# EAGLE board untitled (EAGLE 8.0.0)
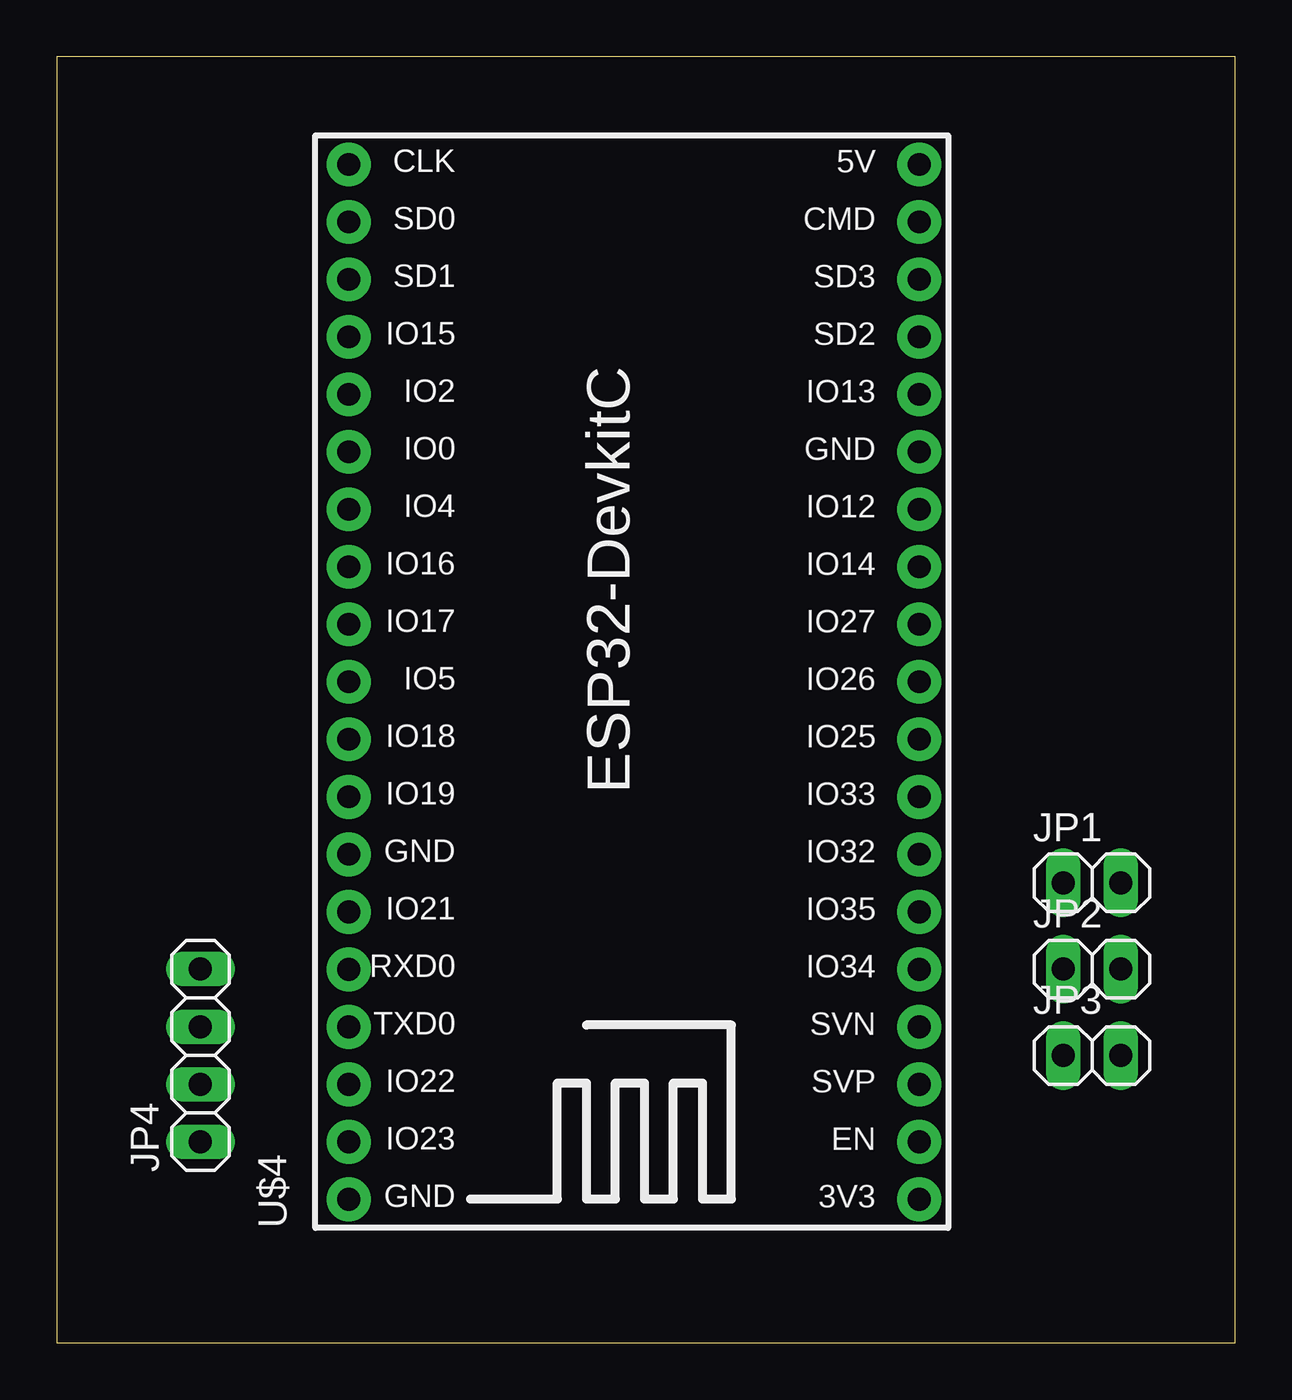
[diagram p0: board, top side]
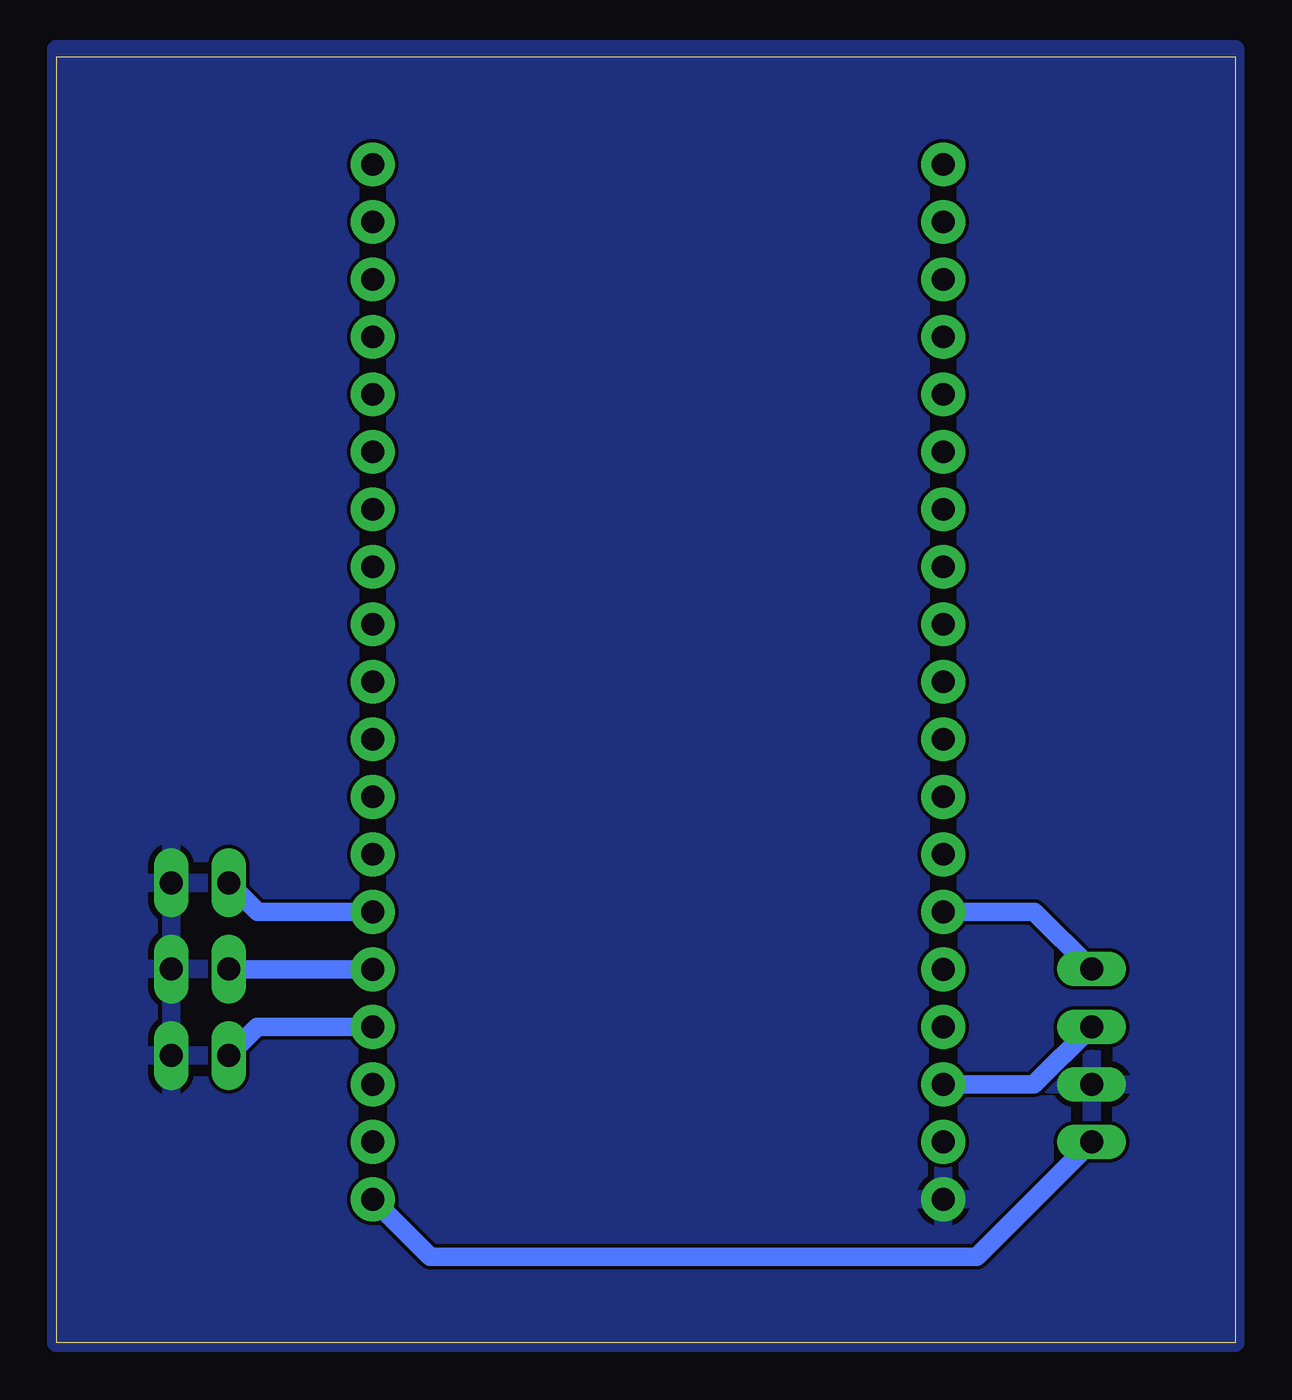
[diagram p1: board, bottom side, seen from below]

Size 52.05 x 56.82 mm. Coordinates in mm from the lower left corner, seen from the top.
Outline: 0,0 52.05,0 52.05,56.82 0,56.82 0,0
Copper layers (1*16): Top 0.035mm / dielectric 1.5mm / Bottom 0.035mm
Design rules "default *": minimum track width 10mil, minimum drill 24mil, track to track 6mil, track to pad 6mil, pad to pad 6mil, via to via 6mil, smd to smd 6mil, copper to edge 0mil, drill to drill 8mil, minimum pad ring 10mil, minimum via ring 8mil, stop-mask expansion 4mil, vias tented up to drill 0mil, thermal gap 10mil

## Footprints (pad centres in the part's own frame; a part is rotated, then mirrored left to right if it is on the bottom)
1X02 = drill 1.016 long: 1 -1.27,0; 2 1.27,0
1X04 = drill 1.016 long: 1 -3.81,0; 2 -1.27,0; 3 1.27,0; 4 3.81,0
ESP32-DEVKITC = drill 1 pad 1.93: 1 -22.87,-13.96; 2 -20.33,-13.96; 3 -17.79,-13.96; 4 -15.25,-13.96; 5 -12.71,-13.96; 6 -10.17,-13.96; 7 -7.63,-13.96; 8 -5.09,-13.96; 9 -2.55,-13.96; 10 -0.01,-13.96; 11 2.53,-13.96; 12 5.07,-13.96; 13 7.61,-13.96; 14 10.15,-13.96; 15 12.69,-13.96; 16 15.23,-13.96; 17 17.77,-13.96; 18 20.31,-13.96; 19 22.85,-13.96; 20 22.85,11.23; 21 20.31,11.23; 22 17.77,11.23; 23 15.23,11.23; 24 12.69,11.23; 25 10.15,11.23; 26 7.61,11.23; 27 5.07,11.23; 28 2.53,11.23; 29 -0.01,11.23; 30 -2.55,11.23; 31 -5.09,11.23; 32 -7.63,11.23; 33 -10.17,11.23; 34 -12.71,11.23; 35 -15.25,11.23; 36 -17.79,11.23; 37 -20.33,11.23; 38 -22.87,11.23

## Placement (x,y rotation side)
JP1  [1X02]  45.72,20.32 0 top
JP2  [1X02]  45.72,16.51 0 top
JP3  [1X02]  45.72,12.7 0 top
JP4  [1X04]  6.35,12.7 90 top
U$4  ESP32DEVKITC  [ESP32-DEVKITC]  24.13,29.21 90 top

## Library data of the parts
JP1-JP4 = pinhead
U$4 = ESP32-DEVKITC

## Nets
GND: JP1.2 JP2.2 JP3.2 JP4.2 U$4.38
N$1: JP1.1 U$4.6
N$2: JP2.1 U$4.5
N$3: JP3.1 U$4.4
N$5: JP4.1 U$4.1
N$7: JP4.4 U$4.33
N$8: JP4.3 U$4.36

## Tracks (layer width: path | path; a pad name or v marks a point on that pad's centre or on a via)
GND
  pour Bottom: 0,57.15 52.07,57.15 52.07,0 0,0
N$1
  Bottom 0.813: JP1.1 43.17,19.04 U$4.6
N$2
  Bottom 0.813: JP2.1 U$4.5
N$3
  Bottom 0.813: JP3.1 43.19,13.96 U$4.4
N$5
  Bottom 0.813: JP4.1 11.43,3.81 35.56,3.81 U$4.1
N$7
  Bottom 0.813: JP4.4 8.88,19.04 U$4.33
N$8
  Bottom 0.813: JP4.3 8.9,11.42 U$4.36